# Altium PCB LatchingFaultActiveHigh.PcbDoc
Units mm, origin at the board's own origin, x right, y up, seen from the top; angles counter-clockwise.
Board outline 92 x 68 mm, 2 copper layers (Top Layer, Bottom Layer), stack 1.569 mm thick; 5 components, 7 nets, 31 pads, 0 vias.
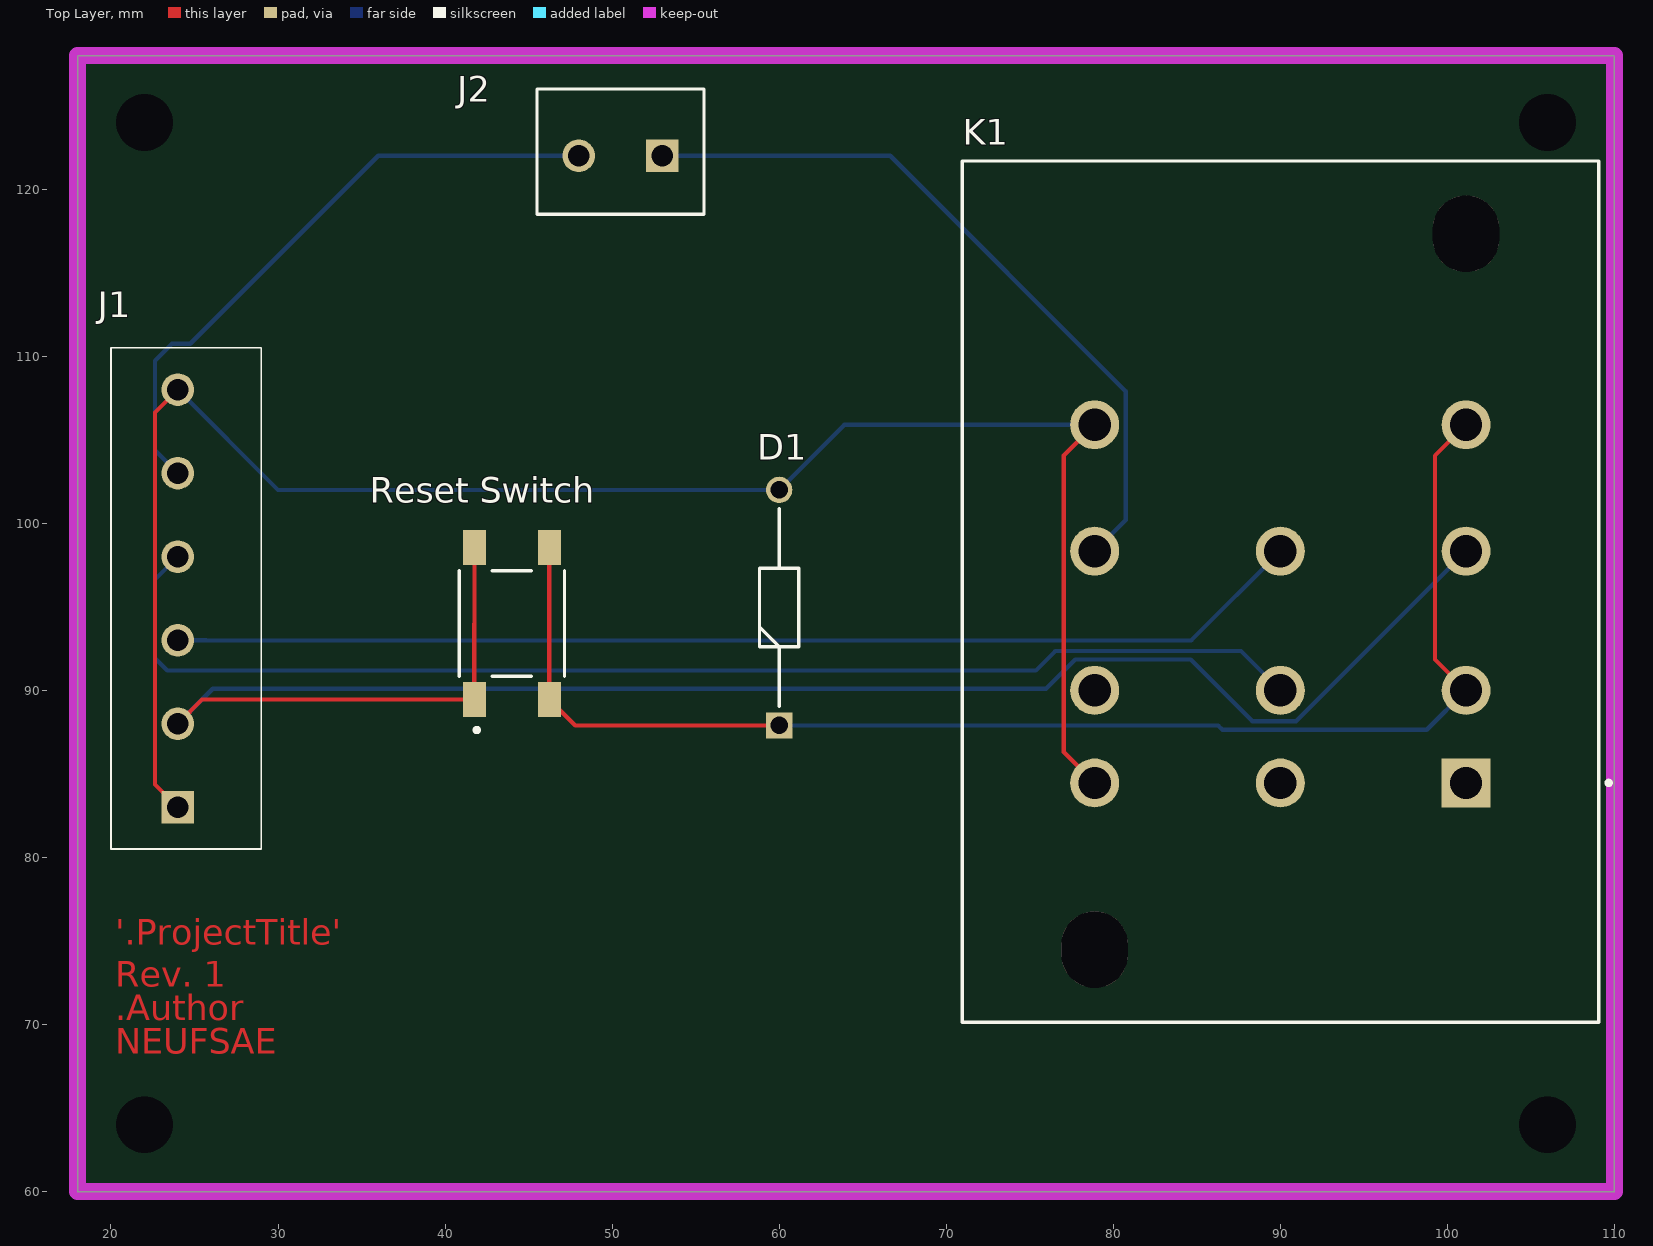
[diagram p0: Top Layer view]
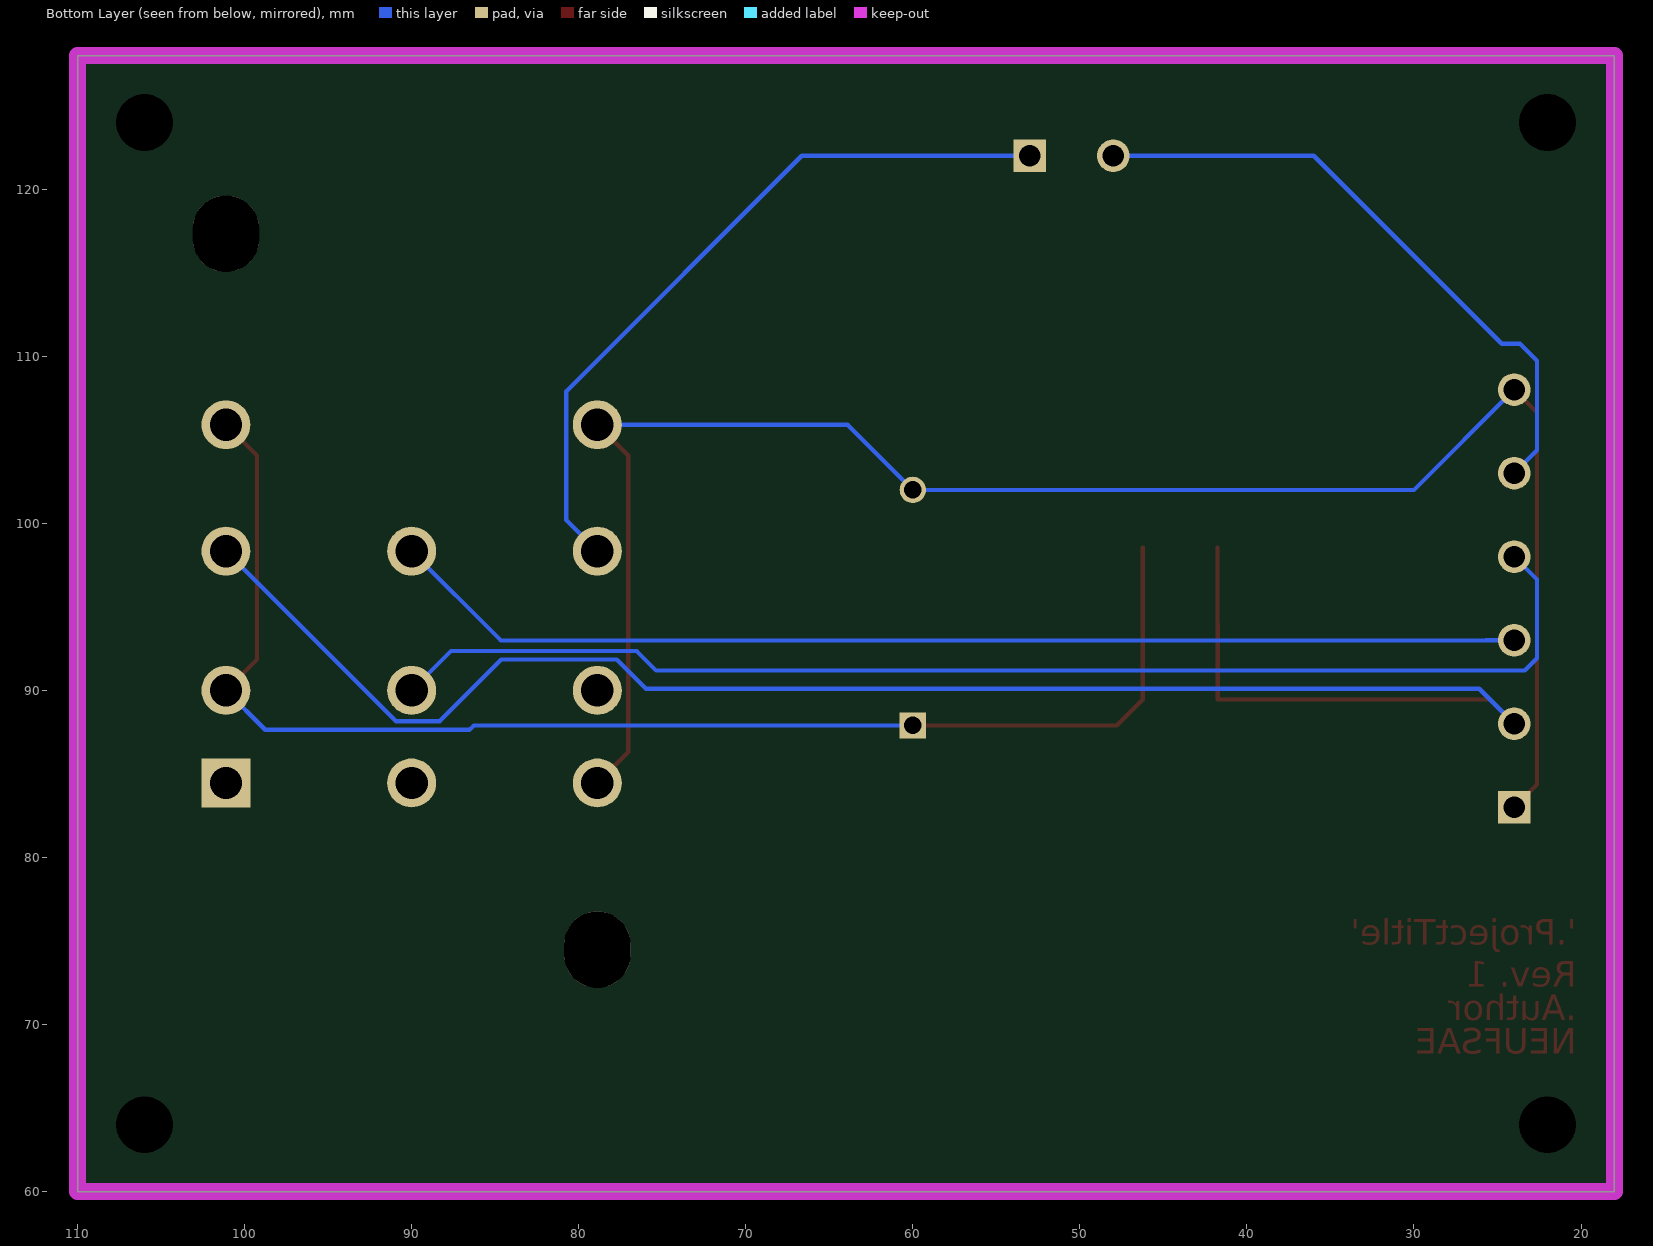
[diagram p1: Bottom Layer view, seen from below]
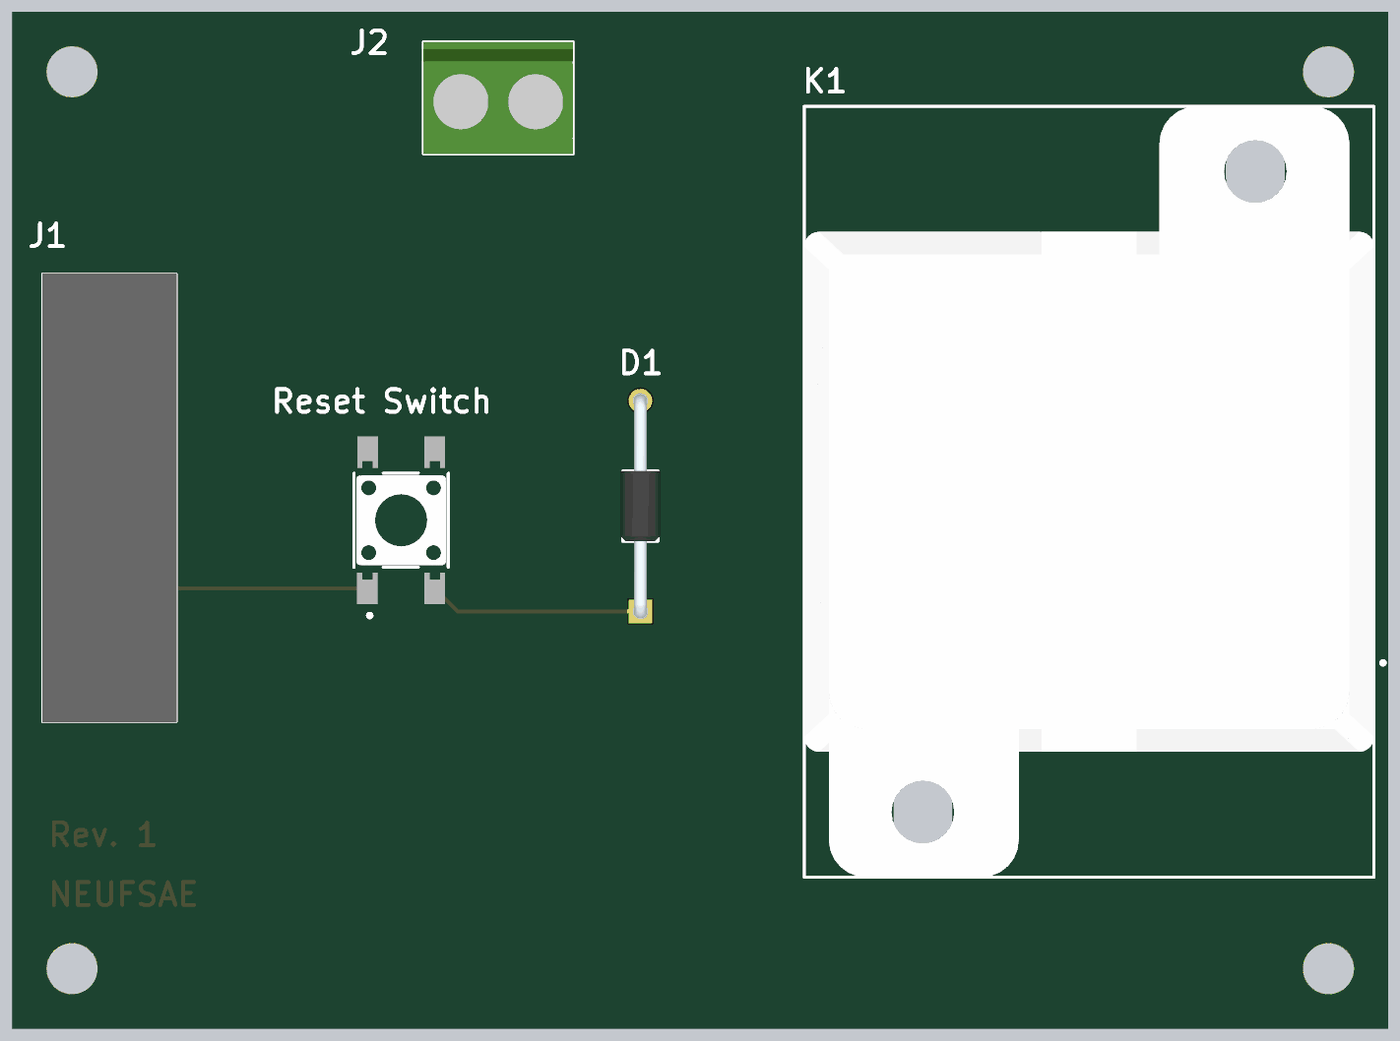
[diagram p2: 3D render of the assembled board from above, using the file's embedded part models]

## Layer stack, top to bottom
Top Solder: solder mask 0.0254, SM-001, Dk 4
Top Layer: signal copper 0.035
Dielectric 1: core 1.4986, Core-043, Dk 4.3
Bottom Layer: signal copper 0.035
Bottom Solder: solder mask 0.0254, SM-001, Dk 4

## Board outline
18,128 18,60 110,60 110,128

## Design rules (kind name [scope] priority, off if disabled: settings)
Clearance [All] p1: gap=0.254 ignorepadtopadclearanceinfootprint=FALSE except(0: Arc-Hole Track-Hole SMDPad-Hole THPad-Hole Via-Hole Fill-Hole Poly-Hole Region-Hole Text-Hole)
PolygonConnect [All] p1: connectstyle=Relief reliefconductorwidth=0.254 reliefentries=4 polygonreliefangle="90 Angle" airgapwidth=0.254
RoutingVias [All] p1: holewidth=0.711 width=1.27 viastyle="Through Hole" minholewidth=0.711 minwidth=1.27 maxholewidth=0.711 maxwidth=1.27
SolderMaskExpansion [All] p1: expansion=0.102 istentingtop=FALSE
Width [All] p1: maxlimit=0.254 minlimit=0.254 preferedwidth=0.254
30 further rules are at their usual default settings.

## Components (designator, comment, footprint, x,y, rotation, side; value= is the part's Value field where it differs from the comment)
D1 "1N4001" DIOAD1410W86L470D235 60,87.9 r90 top
J1 "1935200" 1935200 24,83 r90 top
J2 "691137710002" 691137710002 50.5,122.25 r180 top
K1 "27E046" FP-27E046-MFG 90,95.905 r180 top
"Reset Switch" "FSM2JSMAA" FP-FSM2JSMAA-MFG 44,94 r180 top (schematic designator ResetSwitch)

## Footprints (in the part's own frame and the unit in brackets; to place one, negate y for a bottom-side part, rotate by r counter-clockwise, add the part's x,y. Pads: shape width x height; smd on the part's side, far side on the other; paste and mask are expansions set on the pad)
1935200 [mm]
  rect 1.95x1.95 hole 1.3: 1(0,0)
  round 1.95 hole 1.3: 2(5,0) 3(10,0) 4(15,0) 5(20,0) 6(25,0)
  silkscreen extent -2.5,-5 27.5,4, body extent -2.5,-5 27.5,4, height 11.65
691137710002 [mm] "Horizontal Cable Entry with Pressure Clamp, pitch 5mm, 02p"
  rect 1.95x1.95 hole 1.3: 1(-2.5,0.25)
  round 1.95 hole 1.3: 2(2.5,0.25)
  silkscreen extent -5,-3.75 5,3.75, body extent -5,-3.75 5,3.75, height 11.6
DIOAD1410W86L470D235 [mm]
  rect 1.575x1.575 hole 1.05: 1(0,0)
  round 1.575 hole 1.05: 2(14.1,0)
  silkscreen extent 1.14,-1.17 12.96,1.18, body extent -0.43,-1.35 14.53,1.35, height 2.69
FP-27E046-MFG [mm]
  rect 2.93x2.93 hole 1.93 paste-1000 mask+0: 1(-11.115,11.445)
  round 2.93 hole 1.93 paste-1000 mask+0: 2(0,11.445) 3(11.115,11.445) 4(-11.115,5.905) 5(0,5.905) 6(11.115,5.905) 7(-11.115,-2.425) 8(0,-2.425) 9(11.115,-2.425) A(-11.115,-9.995) B(11.115,-9.995)
  rrect100% 3.96x4.57 hole 4.57 slot 3.96 at 0 deg unplated paste-1000 mask+0: ""(-11.115,-21.425) ""(11.115,21.425)
  silkscreen extent -19.77,-25.78 19.05,25.78, body extent -19.15,-25.88 19.15,25.88, height 0.25
FP-FSM2JSMAA-MFG [mm]
  rect 1.38x2.1 smd paste+0 mask+0: 1(2.25,4.55) 2(2.24,-4.55) 3(-2.24,4.55) 4(-2.24,-4.55)
  silkscreen extent -3.15,-3.15 3.15,6.5, body extent -3.25,-5.7 3.25,5.7, height 0.25

## Part data
D1: "Diode", Manufacturer_Name=MULTICOMP, Datasheet Link=http://www.farnell.com/datasheets/58590.pdf, Manufacturer_Part_Number=1N4001
J1: "Connector", Manufacturer_Name="Phoenix Contact", Mouser Part Number=651-1935200, RS Part Number=8045509, Allied Price/Stock=https://www.alliedelec.com/phoenixcontact-1935200/70054959/, Allied_Number=70054959, Datasheet Link=https://www.phoenixcontact.com/online/portal/us?uri=pxc-oc-itemdetail:pid=1935200&library=usen&tab=1, Height=11.55mm, Manufacturer_Part_Number=1935200, Mouser Price/Stock=https://www.mouser.com/Search/Refine.aspx?Keyword=651-1935200, RS Price/Stock=http://uk.rs-online.com/web/p/products/8045509
J2: library part CMP-1502-03324-1, "Series 1377 - 5.00 mm Horizontal Entry with Pressure Clamp WR-TBL, 2 pin", Manufacturer="Wurth Elektronik", Operating Temperature=-30to120degC, Datasheet URL=http://katalog.we-online.de/pbs/datasheet/691137710002.pdf, Manufacturer URL=http://www.we-online.de, Mounting Technology=THT, Package Reference=691137710002, Packaging=Box, Part Number=691137710002, Pin Number=2, Pitch=5.00mm, Publisher=WurthElektronik
K1: library part CMP-03370-000002-1, "RELAY SOCKET 11 POS THROUGH HOLE", Current Rating=15A, Manufacturer="TE Connectivity", Automotive=No, Category=Conn, ComponentLink2Description=Datasheet, ComponentLink2URL=https://www.te.com/commerce/DocumentDelivery/DDEController?Action=srchrtrv&DocNm=1308242_KUKUP&DocType=DS&DocLang=English, Conn Gender=Female, Conn Orientation=Vertical, Contact Material=Tin, Device Class L1=Connectors, Device Class L2="IC and Component Sockets", Device Class L3=unset, Digikey Description="RELAY SOCKET 11 POS THROUGH HOLE", Height=13.89mm, Is Female=yes, Lead Free=Yes, Manufacturer Part Number=27E046, Mouser Description="Relay Accessories Nylon Relay Socket for Electromechanical Relay", Number Of Contacts=11, Number Of Rows=4, Octopart=https://octopart.com/27e046-te+connectivity-39661310, Package=27E046, RoHS=TRUE
"Reset Switch": library part CMP-03402-000003-1, "SWITCH TACTILE SPST-NO 0.05A 24V", Contact Current Rating=50mA, Contact Resistance=100mΩ, Manufacturer="TE Connectivity", Operating Force=260gf, Package=0, Temperature="-35°C to +85°C", Temperature Range High=+85°C, Temperature Range Low=-35°C, Voltage Rating Dc=24V, Automotive=No, Category=Switch, ComponentLink2Description=Datasheet, ComponentLink2URL=https://www.te.com/commerce/DocumentDelivery/DDEController?Action=showdoc&DocId=Customer+Drawing%7F2-1437565-7%7FV%7Fpdf%7FEnglish%7FENG_CD_2-1437565-7_V.pdf%7F2-1437565-8, Device Class L1=Electromechanical, Device Class L2=Switches, Device Class L3="Pushbutton Switches", Digikey Description="SWITCH TACTILE SPST-NO 0.05A 24V", Electromechanical Life=100000Cycles, Height=4.59mm, Lead Free=Yes, Manufacturer Part Number=FSM2JSMAA, Mount="Surface Mount", Mouser Description="Tactile Switches TACTILE 260G FORCE S", Octopart=https://octopart.com/fsm2jsmaa-te+connectivity-41720620, RoHS=TRUE, Standoff Height=0.05mm, Throw Configuration=SPST-NO

## Free pads (board coordinates)
  round 1.524 hole 3.4: 2(22,64) 2(22,124) 2(106,64) 2(106,124)

## Nets (pads, with @x,y where several pads share a name; then routed paths per layer and width w, separated by ;. In a path a pad name is that pad's centre, name@x,y a point inside that pad or via, vN(x,y) a via of type N, cw(c..) or ccw(c..) an arc to the next point about the centre after c; other vN are vias at no path point)
Net_3: D1.2 J1.1 J1.6 K1.3 K1.B | length 108.1
  Top Layer w0.254: J1.1 22.631,84.369 22.631,106.631 J1.6 ; K1.3 77.038,86.307 77.038,104.053 K1.B
  Bottom Layer w0.254: J1.6 30,102 D1.2 63.9,105.9 K1.B
Net_4: "Reset Switch.3" "Reset Switch.4" D1.1 K1.4 K1.A | length 83.1
  Top Layer w0.254: 46.24,98.55 46.24,89.45 47.79,87.9 D1.1 ; K1.4 99.263,91.852 99.263,104.048 K1.A
  Bottom Layer w0.254: D1.1 86.276,87.9 86.53,87.646 98.761,87.646 K1.4
Net_5: J1.4 K1.5 | length 75.8
  Bottom Layer w0.254: J1.4 22.631,96.631 22.631,91.923 23.368,91.186 75.363,91.186 76.531,92.354 87.646,92.354 K1.5
Net_7: "Reset Switch.1" "Reset Switch.2" J1.2 K1.7 | length 111.9
  Top Layer w0.254: J1.2 25.45,89.45 41.75,89.45 41.75,93.98 41.76,93.99 41.76,98.55
  Bottom Layer w0.254: J1.2 26.094,90.094 75.972,90.094 77.724,91.846 84.633,91.846 88.325,88.154 90.939,88.154 K1.7
Net_8: J1.3 K1.8 | length 68.2
  Bottom Layer w0.254: J1.3 25.705,93 25.715,92.989 84.659,92.989 K1.8
Net_9: J2.1 K1.9 | length 43.9
  Bottom Layer w0.254: J2.1 66.646,122 80.747,107.899 80.747,100.192 K1.9
NetJ1_5: J1.5 J2.2 | length 37.7
  Bottom Layer w0.254: J1.5 22.631,104.369 22.631,109.728 23.647,110.744 24.744,110.744 36,122 J2.2@48,122
pads on no net: K1. K1.1 K1.2 K1.6

## Keep-outs
Keep-Out Layer:
  the board outline again, w1

## Other copper
Top Layer:
  text "'.ProjectTitle'" at 20.254,74.762 h1.52
  text "Rev. 1" at 20.254,72.254 h1.52
  text ".Author" at 20.254,70.254 h1.52
  text "NEUFSAE" at 20.254,68.254 h1.52